# EAGLE board MegaShieldTrioV2 (EAGLE 7.1.0)
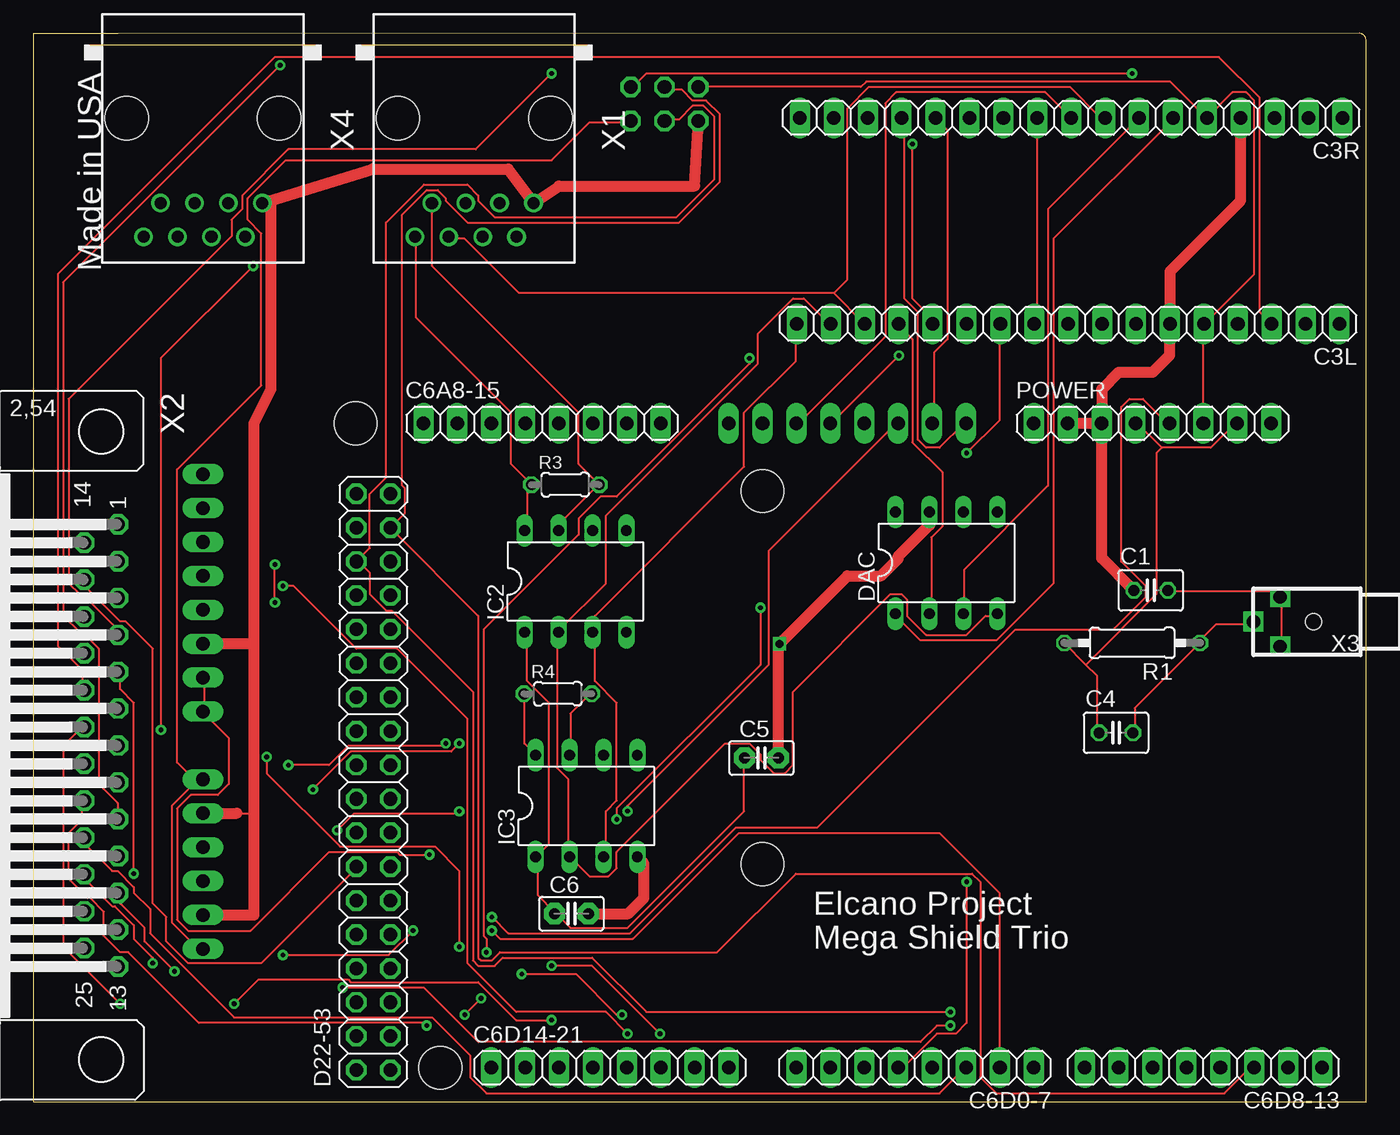
[diagram p0: board, top side]
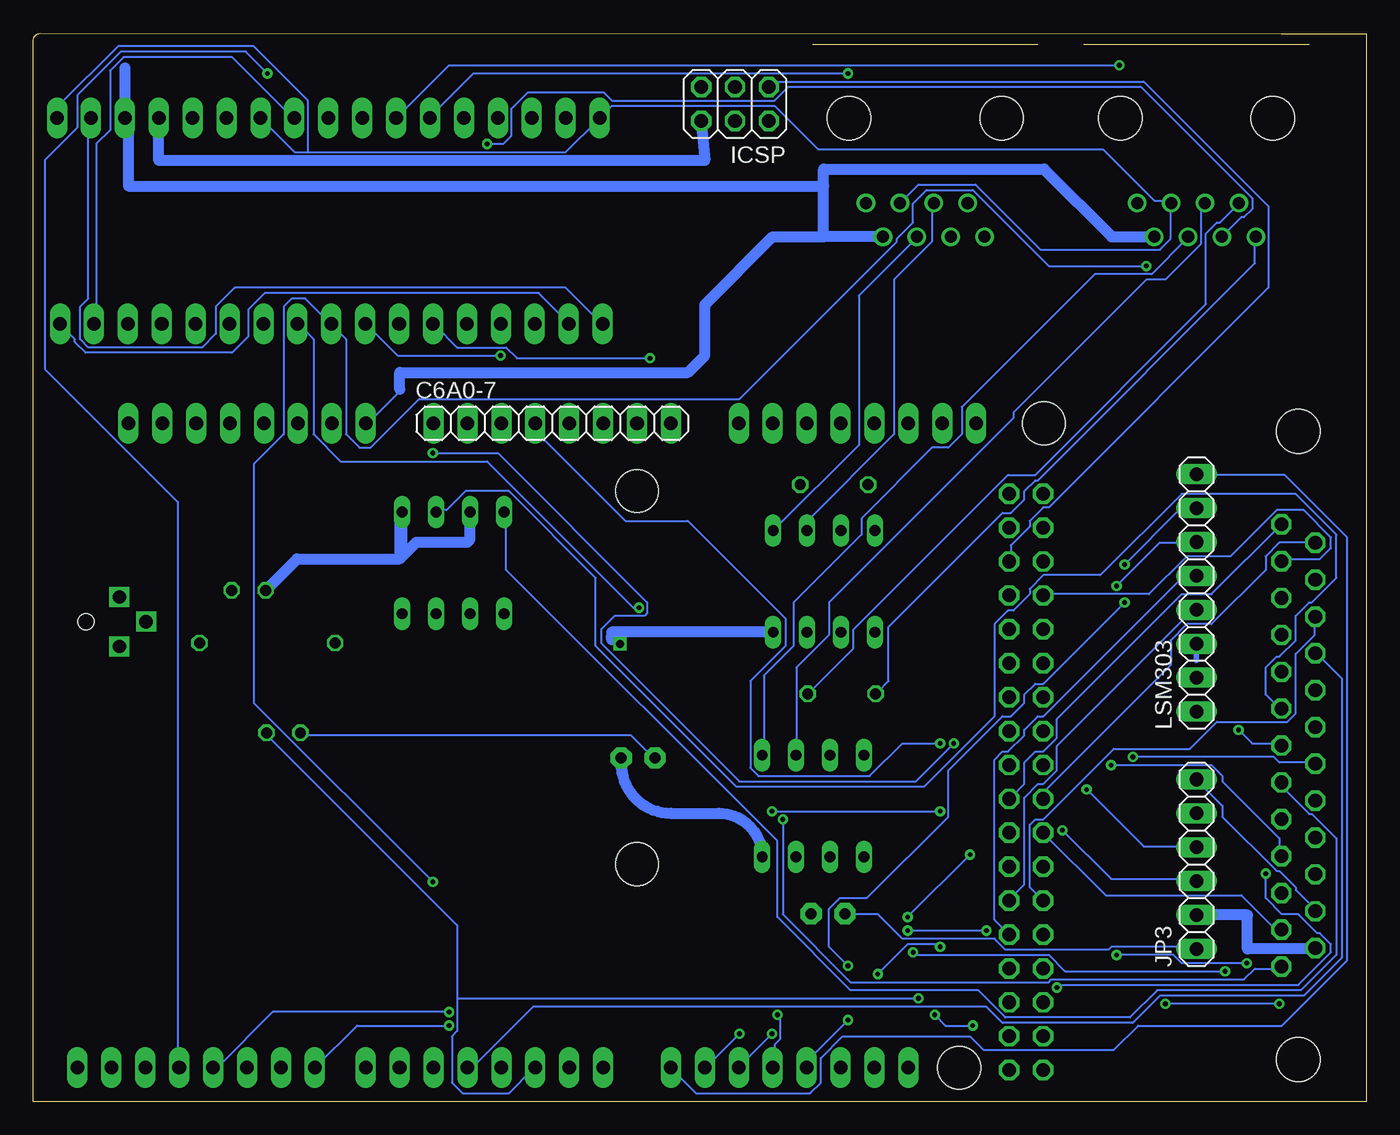
[diagram p1: board, bottom side, seen from below]

Size 99.82 x 80.01 mm. Coordinates in mm from the lower left corner, seen from the top.
Outline: 6.35,80 0,80 0,0 99.82,0 99.82,79.5 arc90 99.31,80.01 6.35,80
Copper layers (1*16): Top 0.0178mm / dielectric 59mil / Bottom 0.0178mm
Design rules "SSC-EAGLE-2Lyr_v1.0.0.3": minimum track width 6mil, minimum drill 14mil, track to track 6mil, track to pad 6mil, pad to pad 6mil, via to via 6mil, smd to smd 6mil, copper to edge 20mil, drill to drill 16mil, minimum pad ring 8mil, minimum via ring 8mil, stop-mask expansion 3mil, vias tented up to drill 0mil, thermal gap 10mil
Net classes: 0 default: width 0.152 mm, drill 0.305 mm, clearance 0.152 mm
Holes 3.2 mm at 24.13,50.8 30.48,2.54 54.61,17.78 54.61,45.72

## Footprints (pad centres in the part's own frame; a part is rotated, then mirrored left to right if it is on the bottom)
C025-030X050 = drill 0.813 octagon: 1 -1.27,0; 2 1.27,0
1X17 = drill 1.016 long: 1 -20.32,0; 2 -17.78,0; 3 -15.24,0; 4 -12.7,0; 5 -10.16,0; 6 -7.62,0; 7 -5.08,0; 8 -2.54,0; 9 0,0; 10 2.54,0; 11 5.08,0; 12 7.62,0; 13 10.16,0; 14 12.7,0; 15 15.24,0; 16 17.78,0; 17 20.32,0
C2.5-2 = drill 0.813 pad 1.6 octagon: 1 -1.27,0; 2 1.27,0
1X08 = drill 1.016 long: 1 -8.89,0; 2 -6.35,0; 3 -3.81,0; 4 -1.27,0; 5 1.27,0; 6 3.81,0; 7 6.35,0; 8 8.89,0
2X18 = drill 1.016 octagon: 1 -21.59,-1.27; 2 -21.59,1.27; 3 -19.05,-1.27; 4 -19.05,1.27; 5 -16.51,-1.27; 6 -16.51,1.27; 7 -13.97,-1.27; 8 -13.97,1.27; 9 -11.43,-1.27; 10 -11.43,1.27; 11 -8.89,-1.27; 12 -8.89,1.27; 13 -6.35,-1.27; 14 -6.35,1.27; 15 -3.81,-1.27; 16 -3.81,1.27; 17 -1.27,-1.27; 18 -1.27,1.27; 19 1.27,-1.27; 20 1.27,1.27; 21 3.81,-1.27; 22 3.81,1.27; 23 6.35,-1.27; 24 6.35,1.27; 25 8.89,-1.27; 26 8.89,1.27; 27 11.43,-1.27; 28 11.43,1.27; 29 13.97,-1.27; 30 13.97,1.27; 31 16.51,-1.27; 32 16.51,1.27; 33 19.05,-1.27; 34 19.05,1.27; 35 21.59,-1.27; 36 21.59,1.27
DIL08 = drill 0.813 long: 1 -3.81,-3.81; 2 -1.27,-3.81; 3 1.27,-3.81; 4 3.81,-3.81; 5 3.81,3.81; 6 1.27,3.81; 7 -1.27,3.81; 8 -3.81,3.81
2X03 = drill 1.016 octagon: 1 -2.54,-1.27; 2 -2.54,1.27; 3 0,-1.27; 4 0,1.27; 5 2.54,-1.27; 6 2.54,1.27
1X06 = drill 1.016 long: 1 -6.35,0; 2 -3.81,0; 3 -1.27,0; 4 1.27,0; 5 3.81,0; 6 6.35,0
0207/10 = drill 0.813 octagon: 1 -5.08,0; 2 5.08,0
0204/5 = drill 0.813 octagon: 1 -2.54,0; 2 2.54,0
RJ45-NO-SHIELD = drill 0.9 pad 1.4: 1 -4.445,6.35; 2 -3.175,8.89; 3 -1.905,6.35; 4 -0.635,8.89; 5 0.635,6.35; 6 1.905,8.89; 7 3.175,6.35; 8 4.445,8.89 | hole 3.251: -5.715,0; 5.715,0
M25H = drill 1.016 octagon: 1 -16.561,1.27; 2 -13.792,1.27; 3 -11.049,1.27; 4 -8.28,1.27; 5 -5.512,1.27; 6 -2.769,1.27; 7 0,1.27; 8 2.769,1.27; 9 5.512,1.27; 10 8.28,1.27; 11 11.049,1.27; 12 13.792,1.27; 13 16.561,1.27; 14 -15.189,-1.27; 15 -12.421,-1.27; 16 -9.652,-1.27; 17 -6.909,-1.27; 18 -4.14,-1.27; 19 -1.372,-1.27; 20 1.372,-1.27; 21 4.14,-1.27; 22 6.909,-1.27; 23 9.652,-1.27; 24 12.421,-1.27; 25 15.189,-1.27 | hole 3.302: 23.52,0; -23.52,0
ODO_JACK = drill 1 square: P$1 4.5,0; P$2 2.5,1.85; P$3 2.5,-1.85 | hole 1.2: 0,0

## Placement (x,y rotation side)
C1  1 uF  [C025-030X050]  83.69,38.29 0 top
C3L  Pilot digital  [1X17]  77.51,58.25 180 top
C3R  Pilot analog  [1X17]  77.73,73.68 180 top
C4  1 uF  [C025-030X050]  81.09,27.62 0 top
C5  0.1uF  [C2.5-2]  54.53,25.74 0 top
C6  0.1uF  [C2.5-2]  40.3,14.07 0 top
C6A0-7  C6 Analog In 0-7  [1X08]  60.96,50.8 0 bottom
C6A8-15  [1X08]  38.1,50.8 0 top
C6D0-7  GPS  [1X08]  66.04,2.54 180 top
C6D8-13  C6D8-13  [1X08]  87.63,2.54 180 top
C6D14-21  GPS  [1X08]  43.18,2.54 0 top
D22-53  High digital  [2X18]  25.46,23.94 90 top
DAC  MCP 4802  [DIL08]  68.39,40.35 0 top
IC2  DS 8291  [DIL08]  40.6,38.96 0 top
IC3  DS 8291  [DIL08]  41.42,22.13 0 top
ICSP  C6  [2X03]  47.27,74.71 180 bottom
JP3  Turns  [1X06]  12.7,17.78 90 bottom
LSM303  [1X08]  12.7,38.1 90 bottom
POWER  C6 Power  [1X08]  83.82,50.8 0 top
R1  4.7 K  [0207/10]  82.3,34.35 180 top
R3  100  [0204/5]  39.84,46.21 0 top
R4  100  [0204/5]  39.28,30.54 0 top
X1  RJ45-8L-B  [RJ45-NO-SHIELD]  33.02,73.66 180 top
X2  Vehicle control  [M25H]  5.08,26.67 270 top
X3  2odo__  [ODO_JACK]  95.89,35.94 180 top
X4  RJ45-8L-B  [RJ45-NO-SHIELD]  12.7,73.66 180 top

## Library data of the parts
C1 C4 R1 = rcl
C3L C3R C6A0-7 C6A8-15 C6D0-7 C6D8-13 C6D14-21 D22-53 ICSP JP3 LSM303 POWER = pinhead
C5 C6 = capacitor-wima
DAC IC2 IC3 = ic-package
R3 R4 = resistor
X1 X4 = con-tycoelectronics; MF: TYCO ELECTRONICS; MPN: RJ45-8L-B; OC_FARNELL: 1279843; OC_NEWARK: 52K4445
X2 = con-subd; OC_FARNELL: unknown; OC_NEWARK: unknown
X3 = Elcano

## Nets
2TX6RX: C6D14-21.4 X2.19
3MISO: C3L.17 C3R.2 IC2.3 IC3.3
3MOSI: C3L.1 C3L.16 DAC.4 IC2.2 IC3.2
3SCK: C3R.1 C3R.7 C3R.17 DAC.3 X1.3 X4.3
3SS5F: C3L.2 C3L.15 C3R.8 X1.6
3SS5R: C3L.13 X4.6
3SS_DAC: C3L.14 DAC.2
3TX2RX: C3L.3 X2.18
3V3: LSM303.1 LSM303.2 POWER.5
5V_C3: C3R.6 DAC.1
6MISO: C6D8-13.4 D22-53.31 ICSP.1
6MOSI: C6D8-13.5 D22-53.32 ICSP.4
6SCK: C6D8-13.3 D22-53.33 ICSP.3
6SCL: C6D14-21.8 LSM303.8
6SDA: C6D14-21.7 LSM303.7
6TX2RX: C6D14-21.5 X2.20
+5V: C4.1 C5.1 C6.1 IC2.1 IC3.1 ICSP.2 JP3.1 JP3.6 POWER.4 POWER.7 R1.2 X2.24
A0: C3R.14 C6A0-7.1
A1: C3R.13 C6A0-7.2
A5: C3R.9 C6A0-7.6
ACK26: C6D0-7.4 X2.17
ACK34: C3R.11 X2.9
ACK43: C3L.10 C3R.10 C6A0-7.5
ACK62: C6D0-7.3 X2.22
AUTREQ: C3L.9 C6D0-7.5 X2.7
CLICK: C4.2 C6D0-7.6 R1.1 X2.21 X3.P$1
CRS_RVS: C3L.8 X2.13
CRSSTR: DAC.6 X2.6
CRSTHR: DAC.8 X2.8
D09: D22-53.18 X2.14
DRDY: D22-53.11 LSM303.4
GND: C1.1 C3L.6 C3R.4 C5.2 C6.2 DAC.5 DAC.7 IC2.4 IC3.4 ICSP.6 JP3.2 JP3.5 LSM303.3 POWER.2 POWER.3 X1.1 X2.25 X4.1
I1LSM: C6D14-21.6 LSM303.6
I2LSM: D22-53.9 LSM303.5
LED1: C6D8-13.8 X2.5
LED3: C3R.12 X2.4
LED5: D22-53.30 X2.2
LED6: D22-53.17 X2.1
LED7: D22-53.14 X2.15
LED8: D22-53.12 X2.16
MANRQ: C3L.11 X2.10
MISO+: IC2.6 X1.5
MISO+R: IC3.6 X4.5
MISO-: IC2.5 X1.4
MISO-R: IC3.5 X4.4
MOSI+: IC2.8 R3.1 X1.8
MOSI+R: IC3.8 R4.1 X4.8
MOSI-: IC2.7 R3.2 X1.7
MOSI-R: IC3.7 R4.2 X4.7
N$23: C1.2 X3.P$2 X3.P$3
RDY26: D22-53.16 X2.12
RDY32: C3L.12 X2.11
RDY62: C6D0-7.2 X2.23
RESET: C3L.5 C3R.5 ICSP.5 POWER.6
STR_L: C6A0-7.3 JP3.3
STR_R: C6A0-7.4 JP3.4
VIN: C3R.3 POWER.1 X1.2 X4.2

## Tracks (layer width: path | path; a pad name or v marks a point on that pad's centre or on a via)
2TX6RX  (via drill 0.36)
  Top 0.152: v38.81,6.1 36.17,6.1 33.33,8.94 23.77,8.94 23.57,9.14 16.87,9.14 v15.04,7.32 | v6.5,7.32 2.23,11.58 2.23,26.62 3.66,28.04 X2.19
  Bottom 0.152: v38.81,6.1 41.86,3.05 41.86,2.64 C6D14-21.4 | v6.5,7.32 v15.04,7.32
3MISO
  Top 0.152: IC3.3 42.88,18.49 42.88,21.74 43.69,22.55 43.69,29.87 42.06,31.5 42.06,35.15 IC2.3 42.06,35.36 42.06,36.37 53.24,47.55 53.24,51.61 57.1,55.47 57.1,58.12 C3L.17
  Bottom 0.152: C3R.2 95.71,73.56 95.71,60.15 96.32,59.54 96.32,57.1 95.71,56.49 87.17,56.49 86.16,57.51 86.16,59.54 84.73,60.96 59.94,60.96 57.3,58.32 C3L.17
3MOSI
  Top 0.152: DAC.4 72.14,36.37 71.32,36.37 69.9,34.95 66.85,34.95 65.43,36.37 65.43,37.59 65.02,38 64.21,38 56.9,30.68 56.9,25.2 56.29,24.59 55.47,24.59 54.46,25.6 54.46,26.01 53.65,26.82 51.82,26.82 43.69,18.69 43.69,17.48 43.08,16.87 41.66,16.87 40.23,18.29 IC3.2 40.03,18.49 40.03,24.18 39.22,24.99 39.22,35.15 IC2.2 39.42,35.36 42.88,38.81 42.88,43.89 54.25,55.27 54.25,57.51 56.9,60.15 57.71,60.15 59.54,58.32 C3L.16
  Bottom 0.152: C3L.1 97.74,58.12 96.72,57.1 96.72,56.9 95.91,56.08 84.94,56.08 83.72,57.3 83.72,59.33 82.5,60.55 61.98,60.55 59.74,58.32 C3L.16
3SCK
  Top 0.152: DAC.3 69.7,36.58 69.7,39.83 76,46.13 76,66.85 82.7,73.56 C3R.7
  Bottom 0.152: X1.3 34.75,67.46 33.53,68.68 29.26,68.68 24.38,63.8 15.44,63.8 14.63,64.62 14.63,67.26 X4.3 14.63,67.46 15.85,67.46 19.71,71.32 41.05,71.32 44.3,74.57 56.49,74.57 57.3,73.76 C3R.17 57.51,73.56 59.94,71.12 79.25,71.12 | 79.25,71.12 80.26,71.12 82.7,73.56 C3R.7 | 79.25,71.12 79.25,74.98 83.31,79.05 93.47,79.05 97.94,74.57 97.94,73.76 C3R.1
3SS5F
  Top 0.152: 59.94,60.55 36.37,60.55 32.31,64.62 31.29,64.62 X1.6 | 59.94,60.55 62.18,58.32 C3L.15 | 59.94,60.55 60.96,61.57 60.96,74.37 62.59,76 77.62,76 79.86,73.76 80.26,73.76 C3R.8
  Bottom 0.152: C3L.2 95.1,58.32 95.1,71.73 94.08,72.75 94.08,77.22 93.07,78.23 84.94,78.23 80.47,73.76 C3R.8
3SS5R  (via drill 0.36)
  Top 0.152: v65.84,71.73 65.84,60.15 67.26,58.73 67.26,58.32 C3L.13
  Bottom 0.152: v65.84,71.73 64.62,71.73 64.01,72.34 64.01,74.37 62.79,75.59 57.1,75.59 56.49,74.98 44.3,74.98 43.28,76 16.87,76 8.53,67.67 8.53,66.85 9.14,66.24 9.35,66.24 10.77,64.82 X4.6
3SS_DAC
  Top 0.152: DAC.2 67.26,36.58 67.26,42.27 68.07,43.08 68.07,47.14 65.84,49.38 65.84,57.1 64.82,58.12 C3L.14
3TX2RX
  Top 0.152: X2.18 3.66,30.89 3.66,32.31 1.83,34.14 1.83,61.98 18.09,78.23 88.8,78.23 91.85,75.18 91.85,59.13 92.66,58.32 C3L.3
3V3  (via drill 0.36)
  Top 0.152: LSM303.2 12.8,31.7 12.8,29.26 LSM303.1 12.8,29.06 14.63,27.23 14.63,23.77 13.82,22.96 11.79,22.96 10.77,21.95 10.77,13.61 11.58,12.8 16.26,12.8 22.15,18.69 27.23,18.69 27.43,18.49 v29.67,18.49 | v34.34,13.82 35.56,12.6 44.7,12.6 52.63,20.52 58.73,20.52 73.56,35.36 80.87,35.36 83.31,37.8 83.31,38.61 81.48,40.44 81.48,52.02 82.09,52.63 83.11,52.63 84.94,50.8 POWER.5
  Bottom 0.152: v29.67,18.49 v34.34,13.82
5V_C3
  Top 0.152: DAC.1 64.62,36.37 66.45,34.54 72.14,34.54 76.4,38.81 76.4,64.62 85.34,73.56 C3R.6
6MISO  (via drill 0.36)
  Top 0.152: v82.3,77.01 45.92,77.01 44.91,76 ICSP.1
  Bottom 0.152: v82.3,77.01 83.92,78.64 93.27,78.64 96.52,75.39 96.52,72.95 98.96,70.51 98.96,54.86 89,44.91 89,2.64 C6D8-13.4 | D22-53.31 26.62,40.64 26.62,41.66 25.2,43.08 25.2,43.48 24.18,44.5 23.77,44.5 7.32,60.96 7.32,67.06 16.66,76.4 44.3,76.4 44.7,76 ICSP.1
6MOSI  (via drill 0.36)
  Top 0.152: v68.68,6.71 45.92,6.71 41.86,10.77 35.15,10.77 34.54,10.16 33.33,10.16 32.92,10.57 32.92,30.68 26.82,36.78 26.42,36.78 25.2,38 25.2,39.62 24.38,40.44 D22-53.32 25.2,41.45 25.2,45.52 26.42,46.74 26.42,65.84 29.26,68.68 32.51,68.68 33.33,67.87 33.33,67.46 34.54,66.24 48.16,66.24 51,69.09 51,73.76 50.19,74.57 49.38,74.57 48.36,73.56 47.35,73.56 ICSP.4
  Bottom 0.152: v68.68,6.71 81.89,6.71 85.95,2.64 86.36,2.64 C6D8-13.5
6SCK
  Top 0.152: C6D8-13.3 91.44,2.44 91.03,2.44 89.2,0.61 72.14,0.61 70.92,1.83 70.92,16.46 70.31,17.07 57.1,17.07 51.21,11.18 34.95,11.18 34.34,10.57 33.53,10.57 33.33,10.77 33.33,36.37 26.82,42.88 D22-53.33 27.84,44.09 27.84,45.92 27.64,46.13 27.64,66.45 29.46,68.28 30.28,68.28 30.89,67.67 30.89,67.46 32.51,65.84 48.36,65.84 51.41,68.89 51.41,73.97 50.39,74.98 49.38,74.98 48.56,75.79 47.35,75.79 ICSP.3
6SCL
  Bottom 0.152: LSM303.8 12.6,46.94 6.1,46.94 1.42,42.27 1.42,10.57 6.3,5.69 17.07,5.69 18.9,3.86 28.65,3.86 29.67,4.88 39.22,4.88 40.84,3.25 40.84,1.42 41.66,0.61 50.19,0.61 52.02,2.44 C6D14-21.8
6SDA  (via drill 0.36)
  Top 0.152: v18.09,37.39 v18.09,40.23 | v38.81,10.16 41.86,10.16 v46.94,5.08
  Bottom 0.152: v18.09,40.23 14.02,44.3 12.8,44.3 LSM303.7 | v18.09,37.39 24.18,31.29 24.79,31.29 25.6,30.48 25.6,29.87 26.62,28.85 27.23,28.85 31.29,24.79 31.29,21.34 37.39,15.24 39.42,15.24 40.23,14.43 40.23,11.58 v38.81,10.16 | v46.94,5.08 49.38,2.64 C6D14-21.7
6TX2RX  (via drill 0.36)
  Top 0.152: v44.09,6.5 43.69,6.5 40.64,9.55 v36.58,9.55 | v31.9,11.58 31.9,17.27 30.07,19.1 22.96,19.1 17.48,24.59 v17.48,25.81
  Bottom 0.152: v44.09,6.5 43.89,6.3 43.89,4.67 44.3,4.27 44.3,2.64 C6D14-21.5 | v36.58,9.55 34.34,11.79 32.11,11.79 v31.9,11.58 | v17.48,25.81 6.91,25.81 6.5,25.4 3.86,25.4 X2.20
+5V
  Top 0.152: 78.84,32.72 R1.2 | 78.84,32.72 79.65,31.9 79.65,27.64 C4.1 | 84.53,48.97 82.7,50.8 POWER.4 | 84.53,48.97 88.19,48.97 90.02,50.8 POWER.7 | 78.84,32.72 84.12,38 84.12,48.56 84.53,48.97 | IC2.1 36.98,35.15 36.98,31.5 38.61,29.87 38.61,19.3 37.8,18.49 IC3.1 37.8,18.29 37.8,15.44 39.01,14.22 C6.1 39.22,14.02 40.23,13.01 44.5,13.01 53.24,21.74 53.24,25.6 C5.1 | 12.19,23.98 10.36,22.15 10.36,13.41 12.19,11.58 12.6,11.58 JP3.1 | 12.19,23.98 12.6,23.98 JP3.6 12.19,23.98 | 12.19,23.98 10.77,25.4 10.77,47.35 17.07,53.65 17.07,65.02 16.05,66.04 16.05,67.67 18.9,70.51 38.81,70.51 41.66,73.36 44.7,73.36 ICSP.2
  Bottom 0.152: C4.1 79.65,27.43 55.07,27.43 53.44,25.81 C5.1 | X2.24 3.86,14.43 5.28,15.85 5.28,16.05 6.5,17.27 6.71,17.27 10.77,21.34 10.77,22.15 12.6,23.98 JP3.6 | C6.1 39.01,14.02 36.58,14.02 34.75,12.19 27.84,12.19 27.03,11.38 19.3,11.38 19.1,11.58 12.8,11.58 JP3.1
A0
  Top 0.152: C3R.14 65.23,73.56 65.23,60.15 66.24,59.13 66.24,49.58 66.85,48.97 67.87,48.97 69.7,50.8 C6A0-7.1
A1
  Top 0.152: C6A0-7.2 67.46,50.8 67.46,56.08 68.48,57.1 68.48,72.75 67.67,73.56 C3R.13
A5
  Top 0.152: C6A0-7.6 57.3,50.8 63.8,57.3 63.8,74.78 64.62,75.59 75.79,75.59 77.62,73.76 C3R.9
ACK26
  Bottom 0.152: C6D0-7.4 67.26,2.64 66.85,2.64 62.38,7.11 28.45,7.11 27.23,5.89 17.48,5.89 15.44,7.92 4.67,7.92 1.83,10.77 1.83,31.7 3.66,33.53 X2.17
ACK34  (via drill 0.36)
  Top 0.152: v18.49,77.62 2.23,61.37 2.23,36.37 3.45,35.15 3.66,35.15 4.88,33.93 4.88,23.77 6.3,22.35 6.3,21.34 X2.9
  Bottom 0.152: v18.49,77.62 68.68,77.62 72.54,73.76 C3R.11
ACK43  (via drill 0.36)
  Top 0.152: v64.82,55.88 59.74,50.8 C6A0-7.5 | C3R.10 75.18,73.56 75.18,58.52 74.98,58.32 C3L.10
  Bottom 0.152: v64.82,55.88 72.54,55.88 74.78,58.12 C3L.10
ACK62
  Top 0.152: C6D0-7.3 69.7,2.44 67.87,0.61 33.93,0.61 32.72,1.83 32.72,3.45 29.87,6.3 15.04,6.3 8.74,12.6 8.74,14.43 7.52,15.65 7.52,16.05 6.3,17.27 5.89,17.27 3.86,19.3 3.86,19.71 X2.22
AUTREQ  (via drill 0.36)
  Top 0.152: v9.55,27.84 9.55,55.68 v16.46,62.59 | v69.9,16.46 69.9,5.89 69.09,5.08 67.67,5.08 65.23,2.64 64.82,2.64 C6D0-7.5
  Bottom 0.152: v9.55,27.84 8.53,26.82 6.5,26.82 X2.7 | v16.46,62.59 23.77,62.59 29.46,68.28 32.92,68.28 33.93,67.26 33.93,65.84 35.15,64.62 35.15,64.41 46.94,52.63 70.92,52.63 74.57,48.97 75.39,48.97 76.4,49.99 76.4,57.1 77.42,58.12 C3L.9 77.62,58.32 79.45,60.15 80.47,60.15 81.08,59.54 81.08,49.99 83.31,47.75 83.31,29.87 v69.9,16.46
CLICK  (via drill 0.36)
  Top 0.152: C4.2 82.5,27.64 82.5,29.46 R1.1 87.38,34.54 88.59,35.76 91.24,35.76 X3.P$1 | v29.46,5.69 29.26,5.89 12.39,5.89 7.11,11.18 6.5,11.18 5.28,12.39 5.28,14.22 4.27,15.24 4.06,15.24 2.64,16.66 2.64,20.12 3.66,21.13 3.66,22.35 X2.21 | v33.53,7.72 v32.31,6.5
  Bottom 0.152: 68.07,7.72 68.07,13.21 82.3,27.43 C4.2 | 68.07,7.72 68.07,5.28 68.48,4.88 68.48,1.42 67.67,0.61 64.21,0.61 62.38,2.44 C6D0-7.6 | v29.46,5.69 31.5,5.69 v32.31,6.5 | 68.07,7.72 v33.53,7.72
CRS_RVS  (via drill 0.36)
  Top 0.152: v43.69,21.13 43.69,21.95 54.46,32.72 v54.46,36.98
  Bottom 0.152: v43.69,21.13 43.69,14.02 38.61,8.94 23.77,8.94 23.57,9.14 9.14,9.14 8.33,9.96 6.5,9.96 X2.13 | v54.46,36.98 54.86,36.98 65.84,47.95 76.81,47.95 78.84,49.99 78.84,57.1 79.86,58.12 C3L.8
CRSSTR
  Bottom 0.152: DAC.6 69.49,44.3 68.89,44.3 67.46,45.72 64.21,45.72 57.71,39.22 57.71,34.14 47.14,23.57 33.12,23.57 27.84,28.85 27.84,35.76 26.82,36.78 26.42,36.78 25.2,38 25.2,38.41 24.18,39.42 19.91,39.42 13.82,45.52 5.28,45.52 2.23,42.47 2.23,39.22 4.06,37.39 4.27,37.39 5.28,36.37 5.28,34.54 6.5,33.33 6.71,33.33 7.52,32.51 7.52,30.48 6.5,29.46 X2.6
CRSTHR
  Bottom 0.152: DAC.8 64.41,44.09 64.41,39.83 44.09,19.51 44.09,13.82 38.61,8.33 29.06,8.33 27.03,6.3 17.68,6.3 15.65,8.33 4.88,8.33 2.23,10.97 2.23,19.71 4.06,21.54 4.27,21.54 6.5,23.77 X2.8
D09
  Bottom 0.152: X2.14 6.5,41.86 7.52,40.84 7.52,39.83 11.58,35.76 13.41,35.76 14.63,34.54 14.63,32.72 24.18,23.16 24.18,22.76 D22-53.18
DRDY
  Bottom 0.152: LSM303.4 12.8,36.78 13.41,36.17 13.61,36.17 23.16,26.62 23.16,24.79 24.18,23.77 24.59,23.77 25.6,22.76 25.6,16.26 26.62,15.24 D22-53.11
GND  (via drill 0.6)
  Top 0.152: 16.51,21.54 15.44,21.54 15.24,21.59
  Top 0.813: POWER.3 80.01,53.34 81.28,54.61 83.82,54.61 85.09,55.88 85.09,58.22 C3L.6 85.13,62.18 90.43,67.48 C3R.4 | POWER.3 POWER.2 | C1.1 80.01,40.7 POWER.3 | ICSP.6 49.53,68.58 39.37,68.58 X1.1 35.56,69.85 25.4,69.85 X4.1 17.78,67.31 17.78,53.34 16.51,50.8 16.51,34.29 | 16.51,34.29 LSM303.3 | JP3.5 15.24,21.59 | JP3.2 16.51,13.97 16.51,21.54 16.51,34.29 | C6.2 44.55,14.07 45.72,15.24 45.72,17.83 IC3.4 | C5.2 55.8,34.21 v55.88,34.29 60.96,39.37 63.5,39.37 64.77,40.64 64.77,40.83 67.12,43.18 DAC.7
  Bottom 0.152: v55.88,34.29 55.88,34.54 56.2,34.61
  Bottom 0.406: LSM303.3 12.7,33.02
  Bottom 0.813: C1.1 80.07,40.64 72.39,40.64 | 72.39,40.64 72.2,40.83 | 72.2,40.83 DAC.5 72.39,43.97 72.39,40.64 | 72.2,40.83 71.12,41.91 67.31,41.91 67.12,42.1 DAC.7 | C5.2 55.8,25.32 arc-90 52.07,21.59 48.5,21.59 arc90 IC3.4 | X2.25 3.81,11.43 8.89,11.43 8.89,13.97 JP3.2 | IC2.4 56.52,35.15 56.52,34.92 | 56.52,34.92 56.2,34.92 56.2,34.61 56.52,34.61 56.52,34.92 | ICSP.6 49.53,70.48 90.43,70.48 C3R.4
I1LSM  (via drill 0.36)
  Top 0.152: v18.69,38.61 19.51,38.61 24.18,33.93 27.23,33.93 32.51,28.65 32.51,10.36 36.17,6.71 42.88,6.71 v44.5,5.08
  Bottom 0.152: v18.69,38.61 15.44,41.86 12.8,41.86 LSM303.6 | v44.5,5.08 46.94,2.64 C6D14-21.6
I2LSM
  Bottom 0.152: D22-53.9 27.84,13.61 27.84,25.6 27.23,26.21 26.82,26.21 25.6,27.43 25.6,27.84 24.59,28.85 24.18,28.85 13.82,39.22 12.8,39.22 LSM303.5
LED1  (via drill 0.36)
  Top 0.152: v7.52,17.07 7.52,29.87 6.5,30.89 6.5,32.11 X2.5 | v23.16,8.53 29.26,8.53 33.33,4.47 66.45,4.47 67.67,5.69 v68.68,5.69
  Bottom 0.152: v7.52,17.07 7.52,15.24 6.3,14.02 5.08,14.02 3.66,12.6 3.45,12.6 2.64,11.79 2.64,11.18 5.08,8.74 22.96,8.74 v23.16,8.53 | v68.68,5.69 75.59,5.69 C6D8-13.8
LED3  (via drill 0.36)
  Top 0.152: v38.81,77.01 33.12,71.32 19.1,71.32 15.65,67.87 15.65,66.85 14.83,66.04 14.83,64.82 2.64,52.63 2.64,38.81 3.45,38 3.66,38 6.3,35.36 6.3,34.95 X2.4
  Bottom 0.152: v38.81,77.01 66.85,77.01 70.1,73.76 C3R.12
LED5
  Bottom 0.152: D22-53.30 24.18,38 16.26,38 13.41,40.84 10.16,40.84 6.71,44.3 4.67,44.3 2.64,42.27 2.64,41.45 3.45,40.64 6.3,40.64 X2.2
LED6
  Bottom 0.152: X2.1 11.58,38 13.82,38 23.16,28.65 23.16,27.23 24.18,26.21 24.79,26.21 25.6,25.4 25.6,23.77 26.62,22.76 D22-53.17
LED7
  Top 0.152: X2.15 3.86,39.01 3.86,38.61 6.5,35.97 6.91,35.97 8.94,33.93 8.94,14.83 9.96,13.82 9.96,11.99 11.58,10.36 17.07,10.36 24.18,17.48 D22-53.14
LED8
  Bottom 0.152: D22-53.12 25.2,16.05 25.2,20.73 24.79,21.13 24.18,21.13 18.9,26.42 13.21,26.42 11.18,28.45 5.89,28.45 5.28,29.06 5.28,33.53 3.86,34.95 3.86,36.17 X2.16
MANRQ  (via drill 0.36)
  Top 0.152: v19.1,25.2 22.15,25.2 23.57,26.62 30.68,26.62 v30.89,26.82 | v69.9,48.56 72.34,51 72.34,58.12 C3L.11
  Bottom 0.152: v19.1,25.2 11.58,25.2 10.77,24.38 10.77,23.98 6.5,19.71 6.5,18.49 X2.10 | v30.89,26.82 33.73,23.98 46.94,23.98 57.3,34.34 57.3,35.36 56.29,36.37 54.05,36.37 53.85,36.58 53.85,37.39 65.02,48.56 v69.9,48.56
MISO+
  Bottom 0.152: IC2.6 41.86,42.88 41.86,43.48 35.36,49.99 35.36,61.57 32.51,64.41 32.51,67.26 X1.5
MISO+R
  Bottom 0.152: IC3.6 42.67,26.01 42.67,32.51 40.23,34.95 40.23,37.39 26.42,51.21 26.42,51.61 16.46,61.57 15.04,61.57 12.39,64.21 12.39,67.06 12.19,67.26 X4.5
MISO-
  Bottom 0.152: IC2.5 44.3,42.88 38,49.17 38,60.35 33.73,64.62 X1.4
MISO-R
  Bottom 0.152: IC3.5 45.11,26.01 45.11,31.9 42.88,34.14 42.88,37.39 37.8,42.47 37.8,43.69 32.51,48.97 31.29,48.97 30.28,49.99 30.28,52.02 20.32,61.98 16.05,61.98 13.41,64.62 X4.4
MOSI+
  Top 0.152: IC2.8 36.98,42.88 36.98,45.92 37.19,46.13 R3.1 37.19,46.33 35.76,47.75 35.76,51.61 28.65,58.73 28.65,64.62 X1.8
MOSI+R
  Top 0.152: R4.1 36.78,30.48 36.78,26.82 37.59,26.01 IC3.8
  Bottom 0.152: X4.8 8.33,64.62 8.33,62.79 24.59,46.53 24.79,46.53 25.6,45.72 25.6,45.11 26.62,44.09 27.23,44.09 35.76,35.56 35.76,31.5 36.58,30.68 R4.1
MOSI-
  Top 0.152: IC2.7 39.42,42.88 39.42,43.28 42.27,46.13 R3.2 42.27,46.33 40.84,47.75 40.84,51.61 29.87,62.59 29.87,67.26 X1.7
MOSI-R
  Top 0.152: IC3.7 40.23,26.01 40.23,29.06 41.66,30.48 R4.2
  Bottom 0.152: X4.7 9.55,67.26 10.97,65.84 11.18,65.84 11.99,65.02 11.99,59.74 24.79,46.94 26.82,46.94 38.41,35.36 38.41,33.93 41.66,30.68 R4.2
N$23
  Top 0.152: C1.2 85.14,38.2 92.86,38.2 93.27,37.8 X3.P$3 93.47,37.59 93.47,34.14 X3.P$2
RDY26
  Bottom 0.152: D22-53.16 19.51,15.44 9.35,15.44 6.91,13.01 6.5,13.01 X2.12
RDY32  (via drill 0.36)
  Top 0.152: v10.57,9.75 8.33,11.99 8.33,13.01 6.5,14.83 6.5,15.44 X2.11 | v33.93,11.18 33.93,12.19 33.73,12.39 33.73,35.36 40.84,42.47 40.84,43.69 42.47,45.31 43.69,45.31 53.65,55.27 v53.65,55.68
  Bottom 0.152: v10.57,9.75 22.55,9.75 23.77,10.97 33.73,10.97 v33.93,11.18 | v53.65,55.68 63.6,55.68 64.41,56.49 68.07,56.49 69.7,58.12 C3L.12
RDY62  (via drill 0.36)
  Top 0.152: v34.34,12.8 34.95,12.19 44.91,12.19 52.83,20.12 67.87,20.12 72.34,15.65 72.34,2.64 C6D0-7.2 | v28.45,12.8 26.62,10.97 v18.69,10.97 | v8.94,10.36 8.94,10.77 7.52,12.19 7.52,13.21 6.1,14.63 5.89,14.63 3.66,16.87 X2.23
  Bottom 0.152: v28.45,12.8 v34.34,12.8 | v18.69,10.97 14.43,10.97 13.82,10.36 v8.94,10.36
RESET
  Top 0.152: POWER.6 87.58,50.8 87.58,58.12 C3L.5 87.78,58.32 91.44,61.98 91.44,74.98 90.83,75.59 89.81,75.59 87.99,73.76 C3R.5 87.78,73.76 85.14,76.4 62.38,76.4 61.98,76 49.99,76 ICSP.5
STR_L  (via drill 0.36)
  Top 0.152: v22.76,20.32 23.98,21.54 31.7,21.54 v31.9,21.74 | v44.5,21.74 44.5,22.15 55.07,32.72 55.07,41.25 64.62,50.8 C6A0-7.3
  Bottom 0.152: v22.76,20.32 19.1,16.66 12.8,16.66 JP3.3 | v44.5,21.74 v31.9,21.74
STR_R  (via drill 0.36)
  Top 0.152: v20.93,23.37 23.77,26.21 31.29,26.21 v31.9,26.82
  Bottom 0.152: v20.93,23.37 16.66,19.1 12.8,19.1 JP3.4 | v31.9,26.82 34.75,26.82 37.19,24.38 45.52,24.38 46.13,24.99 46.13,31.5 43.48,34.14 43.48,36.17 50.8,43.48 55.47,43.48 62.18,50.19 62.18,50.8 C6A0-7.4
VIN
  Bottom 0.152: POWER.1 74.78,50.8 72.54,53.03 72.39,53.34
  Bottom 0.813: 92.97,77.41 C3R.3 92.71,73.68 92.71,68.58 40.64,68.58 | 40.64,68.58 40.64,69.85 24.13,69.85 19.05,64.77 X4.2 | X1.2 40.64,64.77 | 40.64,64.77 40.64,68.58 | 72.39,53.34 72.39,54.61 50.8,54.61 49.53,55.88 49.53,59.69 44.45,64.77 40.64,64.77

## Text on the board
tPlace: Made in USA | Elcano Project | Mega Shield Trio